# EAGLE board Mixer-Analog-OPA1644-Rev-C.b#6 (EAGLE 8.4.3)

Size 100 x 90.05 mm. Coordinates in mm from the lower left corner, seen from the top.
Outline: 0,0.05 100,0 100,90 0,90.05 0,0.05
Copper layers (1*16): Top 0.035mm / dielectric 1.5mm / Bottom 0.035mm
Design rules "default": minimum track width 6mil, minimum drill 0.35mm, track to track 6mil, track to pad 6mil, pad to pad 6mil, via to via 6mil, smd to smd 6mil, copper to edge 40mil, drill to drill 6mil, minimum pad ring 10mil, minimum via ring 8mil, stop-mask expansion 4mil, vias tented up to drill 0mil, thermal gap 10mil

## Footprints (pad centres in the part's own frame; a part is rotated, then mirrored left to right if it is on the bottom)
EIA3216-KIT = smd 1.9 x 1.6: A 1.65,0; C -1.65,0
TSSOP14 = smd 0.305 x 0.991: 1 -1.95,-2.918; 2 -1.3,-2.918; 3 -0.65,-2.918; 4 0,-2.918; 5 0.65,-2.918; 6 1.3,-2.918; 7 1.95,-2.918; 8 1.95,2.918; 9 1.3,2.918; 10 0.65,2.918; 11 0,2.918; 12 -0.65,2.918; 13 -1.3,2.918; 14 -1.95,2.918
SJ-3524-SMT = smd 2.5 x 2.2: 1 3.85,-4.6; 3 -3.85,-2.7 | smd 2.5 x 2.8: 2 3.85,4.7 | smd 2.8 x 2.5: 4 -0.75,8.85 | hole 1.7: 0,-3.5; 0,3.5
USB-B-MICRO-SMD = smd 1.45 x 0.4: D+ 2.725,0; D- 2.725,0.65; GND 2.725,-1.3; ID 2.725,-0.65; VBUS 2.725,1.3 | smd 1.5 x 1.8: SHIELD1 0,3.685; SHIELD2 0,-3.685 | smd 1.5 x 2.5: SHIELD3 0,0 | hole 0.85: 2.2,1.9; 2.2,-1.9
1X02_LOCK = drill 1.016 pad 1.88: 1 -0.178,0; 2 2.718,0
LED3MM = drill 0.813 octagon: A -1.27,0; K 1.27,0
PTV112 = drill 1.1 pad 1.676: 1.1 -3,-11; 1.2 -5,-11; 1.3 5,-11; 2.1 -1,-11; 2.2 1,-11; 2.3 3,-11 | drill 1.6 pad 2.8 square: M1 -6.8,0; M2 6.8,0
0603-RES = smd 1.1 x 1: 1 -0.85,0; 2 0.85,0
POT-DUAL-ALPS-RK10J12E0A0A = drill 1 pad 1.321 square: P$1 -4,0; P$2 -2,0; P$3 0,0; P$4 2,0; P$5 4,0 | drill 1.2: P$6 4.65,10; P$7 -4.65,10

## Placement (x,y rotation side)
C1  10uF  [EIA3216-KIT]  5.57,61.82 180 bottom
C2  10uF  [EIA3216-KIT]  5.08,48.24 0 bottom
C3  10uF  [EIA3216-KIT]  10.81,55.92 180 bottom
C4  10uF  [EIA3216-KIT]  95.24,55.92 180 bottom
C5  10uF  [EIA3216-KIT]  88.58,48.2 0 bottom
C6  10uF  [EIA3216-KIT]  26.32,67.8 90 bottom
C7  10uF  [EIA3216-KIT]  2.69,9.21 270 bottom
C8  10uF  [EIA3216-KIT]  7,9.05 90 bottom
C9  10uF  [EIA3216-KIT]  18.64,72.52 270 bottom
C10  10uF  [EIA3216-KIT]  8.89,36.15 270 bottom
C11  10uF  [EIA3216-KIT]  14,9.05 90 bottom
C18  10uF  [EIA3216-KIT]  37.32,67.8 90 bottom
C19  10uF  [EIA3216-KIT]  18.69,9.21 270 bottom
C20  10uF  [EIA3216-KIT]  24.89,36.15 270 bottom
C21  10uF  [EIA3216-KIT]  30.64,72.52 270 bottom
C22  10uF  [EIA3216-KIT]  30,9.05 90 bottom
C23  10uF  [EIA3216-KIT]  23,9.05 90 bottom
C24  10uF  [EIA3216-KIT]  48.32,67.8 90 bottom
C25  10uF  [EIA3216-KIT]  35.69,9.21 270 bottom
C26  10uF  [EIA3216-KIT]  40.89,36.15 270 bottom
C27  10uF  [EIA3216-KIT]  40.64,72.52 270 bottom
C28  10uF  [EIA3216-KIT]  46,9.05 90 bottom
C29  10uF  [EIA3216-KIT]  39,9.05 90 bottom
C36  10uF  [EIA3216-KIT]  59.32,67.8 90 bottom
C37  10uF  [EIA3216-KIT]  51.69,9.21 270 bottom
C38  10uF  [EIA3216-KIT]  56.89,36.15 270 bottom
C39  10uF  [EIA3216-KIT]  51.64,72.52 270 bottom
C40  10uF  [EIA3216-KIT]  62,9.05 90 bottom
C41  10uF  [EIA3216-KIT]  55,9.05 90 bottom
C48  10uF  [EIA3216-KIT]  70.32,67.8 90 bottom
C49  10uF  [EIA3216-KIT]  66.69,9.21 270 bottom
C50  10uF  [EIA3216-KIT]  72.89,36.15 270 bottom
C51  10uF  [EIA3216-KIT]  62.64,72.52 270 bottom
C52  10uF  [EIA3216-KIT]  78,9.05 90 bottom
C53  10uF  [EIA3216-KIT]  71,9.05 90 bottom
C60  10uF  [EIA3216-KIT]  81.32,67.8 90 bottom
C61  10uF  [EIA3216-KIT]  82.69,9.21 270 bottom
C62  10uF  [EIA3216-KIT]  88.89,36.15 270 bottom
C63  10uF  [EIA3216-KIT]  73.64,72.52 270 bottom
C64  10uF  [EIA3216-KIT]  94,9.05 90 bottom
C65  10uF  [EIA3216-KIT]  87,9.05 90 bottom
IC1  OPA1644  [TSSOP14]  49,53.05 0 bottom
IC2  OPA1644  [TSSOP14]  8.98,17.39 0 bottom
IC4  OPA1644  [TSSOP14]  24.98,17.39 0 bottom
IC5  OPA1644  [TSSOP14]  40.98,17.39 0 bottom
IC7  OPA1644  [TSSOP14]  56.98,17.39 0 bottom
IC9  OPA1644  [TSSOP14]  72.98,17.39 0 bottom
IC11  OPA1644  [TSSOP14]  88.98,17.39 0 bottom
J1  SJ-3524-SMT  [SJ-3524-SMT]  22.46,70.62 180 top
J3  SJ-3524-SMT  [SJ-3524-SMT]  33.46,70.62 180 top
J4  SJ-3524-SMT  [SJ-3524-SMT]  44.46,70.62 180 top
J6  SJ-3524-SMT  [SJ-3524-SMT]  55.46,70.62 180 top
J8  [USB-B-MICRO-SMD]  5.66,77.01 270 top
J9  SJ-3524-SMT  [SJ-3524-SMT]  66.46,70.62 180 top
J11  SJ-3524-SMT  [SJ-3524-SMT]  77.46,70.62 180 top
JP1  [1X02_LOCK]  4.24,71.6 0 top
LED1  [LED3MM]  5.73,67.74 180 top
OUTPUT1  SJ-3524-SMT  [SJ-3524-SMT]  6.99,52.04 270 top
OUTPUT2  SJ-3524-SMT  [SJ-3524-SMT]  93,52.05 90 top
POT1  10k  [PTV112]  110.7,71.05 0 top  (outside the outline)
POT2  10k  [PTV112]  -22.67,54.05 0 top  (outside the outline)
POT3  10K  [PTV112]  9,15.05 0 top
POT4  100K  [PTV112]  9,35.73 0 top
POT7  10K  [PTV112]  25,15.05 0 top
POT8  100K  [PTV112]  25,35.73 0 top
POT9  10K  [PTV112]  41,15.05 0 top
POT10  100K  [PTV112]  41,35.73 0 top
POT13  10K  [PTV112]  57,15.05 0 top
POT14  100K  [PTV112]  57,35.73 0 top
POT17  10K  [PTV112]  73,15.05 0 top
POT18  100K  [PTV112]  73,35.73 0 top
POT21  10K  [PTV112]  89,15.05 0 top
POT22  100K  [PTV112]  89,35.73 0 top
R1  220  [0603-RES]  2,69.05 270 bottom
R2  1M  [0603-RES]  60,50.06 0 bottom
R3  1M  [0603-RES]  58,48.05 0 bottom
R4  1M  [0603-RES]  7,29.05 90 bottom
R5  1M  [0603-RES]  10,29.04 90 bottom
R6  10k  [0603-RES]  10.71,7.96 90 bottom
R7  1M  [0603-RES]  12.03,33.32 270 bottom
R8  1M  [0603-RES]  12.05,37.92 270 bottom
R9  10k  [0603-RES]  5,37.05 270 bottom
R16  10k  [0603-RES]  26.71,7.96 90 bottom
R17  10k  [0603-RES]  21,37.05 270 bottom
R18  1M  [0603-RES]  23,29.05 90 bottom
R19  1M  [0603-RES]  26,29.04 90 bottom
R20  1M  [0603-RES]  28.03,33.32 270 bottom
R21  1M  [0603-RES]  28.05,37.92 270 bottom
R22  10k  [0603-RES]  42.71,7.96 90 bottom
R23  10k  [0603-RES]  37,37.05 270 bottom
R24  1M  [0603-RES]  39,29.05 90 bottom
R25  1M  [0603-RES]  42,29.04 90 bottom
R26  1M  [0603-RES]  44.03,33.32 270 bottom
R27  1M  [0603-RES]  44.05,37.92 270 bottom
R34  10k  [0603-RES]  58.71,7.96 90 bottom
R35  10k  [0603-RES]  53,37.05 270 bottom
R36  1M  [0603-RES]  55,29.05 90 bottom
R37  1M  [0603-RES]  58,29.04 90 bottom
R38  1M  [0603-RES]  60.03,33.32 270 bottom
R39  1M  [0603-RES]  60.05,37.92 270 bottom
R46  10k  [0603-RES]  74.71,7.96 90 bottom
R47  10k  [0603-RES]  69,37.05 270 bottom
R48  1M  [0603-RES]  71,29.05 90 bottom
R49  1M  [0603-RES]  74,29.04 90 bottom
R50  1M  [0603-RES]  76.03,33.32 270 bottom
R51  1M  [0603-RES]  76.05,37.92 270 bottom
R58  10k  [0603-RES]  90.71,7.96 90 bottom
R59  10k  [0603-RES]  85,37.05 270 bottom
R60  1M  [0603-RES]  87,29.05 90 bottom
R61  1M  [0603-RES]  90,29.04 90 bottom
R62  1M  [0603-RES]  92.03,33.32 270 bottom
R63  1M  [0603-RES]  92.05,37.92 270 bottom
U$1  POT-DUAL-ALPS-RK10J12E0A0A  [POT-DUAL-ALPS-RK10J12E0A0A]  -8,5.05 0 top  (outside the outline)

## Library data of the parts
C1-C5 R1-R3 = SparkFun-Passives
C6-C11 C18-C29 C36-C41 C48-C53 C60-C65 = SparkFun-Passives; SPICEPREFIX: C
IC1 JP1 U$1 = CMU-ArtFab
IC2 IC4 IC5 IC7 IC9 IC11 = CMU-ArtFab; SPICEPREFIX: B
J1 J3 J4 J6 J9 J11 = con-cuistack; SPICEPREFIX: E
J8 = SparkFun-Connectors; PROD_ID: CONN-11752
LED1 = led
OUTPUT1 OUTPUT2 = con-cuistack
POT1 POT2 = CMU-ArtFab; AVAILABILITY: Unavailable; DESCRIPTION: Alt# Tce-10111410; MF: STMicroelectronics; MP: PTV112; PACKAGE: None; PRICE: None
POT3 POT4 POT7-POT10 POT13 POT14 POT17 POT18 POT21 POT22 = CMU-ArtFab; AVAILABILITY: Unavailable; DESCRIPTION: Alt# Tce-10111410; MF: STMicroelectronics; MP: PTV112; PACKAGE: None; PRICE: None; SPICEPREFIX: J
R4-R9 R16-R27 R34-R39 R46-R51 R58-R63 = SparkFun-Passives; SPICEPREFIX: R

## Nets
5V: C1.A IC1.4 IC2.4 IC4.4 IC5.4 IC7.4 IC9.4 IC11.4 J8.VBUS JP1.2 LED1.A R3.2 R4.2 R7.2 R18.2 R20.2 R24.2 R26.2 R36.2 R38.2 R48.2 R50.2 R60.2 R62.2
COPY\: IC2.1 IC2.2 POT3.1.3
COPY\2: IC4.1 IC4.2 POT7.1.3
COPY\3: IC5.1 IC5.2 POT9.1.3
COPY\5: IC7.1 IC7.2 POT13.1.3
COPY\7: IC9.1 IC9.2 POT17.1.3
COPY\9: IC11.1 IC11.2 POT21.1.3
DLE: C8.A IC2.7 POT4.1.2
DLE2: C23.A IC4.7 POT8.1.2
DLE3: C29.A IC5.7 POT10.1.2
DLE5: C41.A IC7.7 POT14.1.2
DLE7: C53.A IC9.7 POT18.1.2
DLE9: C65.A IC11.7 POT22.1.2
GND: C1.C IC1.11 IC2.11 IC4.11 IC5.11 IC7.11 IC9.11 IC11.11 J8.GND JP1.1 OUTPUT1.1 OUTPUT2.1 POT3.1.1 POT3.2.1 POT7.1.1 POT7.2.1 POT9.1.1 POT9.2.1 POT13.1.1 POT13.2.1 POT17.1.1 POT17.2.1 POT21.1.1 POT21.2.1 R1.1 R2.1 R5.1 R8.1 R19.1 R21.1 R25.1 R27.1 R37.1 R39.1 R49.1 R51.1 R61.1 R63.1
N$1: IC2.13 POT4.2.3 R9.2
N$3: C7.A POT3.1.2
N$4: IC2.6 POT4.1.3 R6.2
N$5: C6.C IC2.3 R4.1 R5.2
N$6: J1.1
N$7: C2.A IC1.1 POT1.1.2
N$8: C7.C R6.1
N$9: IC2.8 IC2.9 POT3.2.3
N$10: C6.A J1.3
N$11: C9.C IC2.10 R7.1 R8.2
N$12: C9.A J1.2 J1.4
N$13: C10.A POT3.2.2
N$14: C10.C R9.1
N$15: LED1.K R1.2
N$17: C3.A IC1.7 POT1.2.2
N$18: C4.C OUTPUT2.2 OUTPUT2.4
N$19: C5.C OUTPUT2.3
N$21: C4.A IC1.8 POT2.1.2
N$23: C5.A IC1.14 POT2.2.2
N$24: C11.A IC2.14 POT4.2.2
N$34: C22.A IC4.14 POT8.2.2
N$35: J3.1
N$36: IC4.13 POT8.2.3 R17.2
N$37: IC4.8 IC4.9 POT7.2.3
N$38: C21.A J3.2 J3.4
N$39: C18.C IC4.3 R18.1 R19.2
N$40: C18.A J3.3
N$41: C21.C IC4.10 R20.1 R21.2
N$42: C19.A POT7.1.2
N$43: C19.C R16.1
N$44: IC4.6 POT8.1.3 R16.2
N$45: C20.A POT7.2.2
N$46: C20.C R17.1
N$47: C28.A IC5.14 POT10.2.2
N$48: J4.1
N$49: IC5.13 POT10.2.3 R23.2
N$50: IC5.8 IC5.9 POT9.2.3
N$51: C27.A J4.2 J4.4
N$52: C24.C IC5.3 R24.1 R25.2
N$53: C24.A J4.3
N$54: C27.C IC5.10 R26.1 R27.2
N$55: C25.A POT9.1.2
N$56: C25.C R22.1
N$57: IC5.6 POT10.1.3 R22.2
N$58: C26.A POT9.2.2
N$59: C26.C R23.1
N$61: C2.C OUTPUT1.2 OUTPUT1.4
N$62: C3.C OUTPUT1.3
N$75: C40.A IC7.14 POT14.2.2
N$76: J6.1
N$77: IC7.13 POT14.2.3 R35.2
N$78: IC7.8 IC7.9 POT13.2.3
N$79: C39.A J6.2 J6.4
N$80: C36.C IC7.3 R36.1 R37.2
N$81: C36.A J6.3
N$82: C39.C IC7.10 R38.1 R39.2
N$83: C37.A POT13.1.2
N$84: C37.C R34.1
N$85: IC7.6 POT14.1.3 R34.2
N$86: C38.A POT13.2.2
N$87: C38.C R35.1
N$101: C52.A IC9.14 POT18.2.2
N$102: J9.1
N$103: IC9.13 POT18.2.3 R47.2
N$104: IC9.8 IC9.9 POT17.2.3
N$105: C51.A J9.2 J9.4
N$106: C48.C IC9.3 R48.1 R49.2
N$107: C48.A J9.3
N$108: C51.C IC9.10 R50.1 R51.2
N$109: C49.A POT17.1.2
N$110: C49.C R46.1
N$111: IC9.6 POT18.1.3 R46.2
N$112: C50.A POT17.2.2
N$113: C50.C R47.1
N$127: C64.A IC11.14 POT22.2.2
N$128: J11.1
N$129: IC11.13 POT22.2.3 R59.2
N$130: IC11.8 IC11.9 POT21.2.3
N$131: C63.A J11.2 J11.4
N$132: C60.C IC11.3 R60.1 R61.2
N$133: C60.A J11.3
N$134: C63.C IC11.10 R62.1 R63.2
N$135: C61.A POT21.1.2
N$136: C61.C R58.1
N$137: IC11.6 POT22.1.3 R58.2
N$138: C62.A POT21.2.2
N$139: C62.C R59.1
OUT-L: C8.C C23.C C29.C C41.C C53.C C65.C IC1.2 IC1.9 POT1.1.3 POT2.1.3
OUT-R: C11.C C22.C C28.C C40.C C52.C C64.C IC1.6 IC1.13 POT1.2.3 POT2.2.3
VGND: IC1.3 IC1.5 IC1.10 IC1.12 IC2.5 IC2.12 IC4.5 IC4.12 IC5.5 IC5.12 IC7.5 IC7.12 IC9.5 IC9.12 IC11.5 IC11.12 R2.2 R3.1

## Tracks (layer width: path | path; a pad name or v marks a point on that pad's centre or on a via)
5V  (23 unrouted)
COPY\  (2 unrouted)
COPY\2  (2 unrouted)
COPY\3  (2 unrouted)
COPY\5  (2 unrouted)
COPY\7  (2 unrouted)
COPY\9  (2 unrouted)
DLE  (2 unrouted)
DLE2  (2 unrouted)
DLE3  (2 unrouted)
DLE5  (2 unrouted)
DLE7  (2 unrouted)
DLE9  (2 unrouted)
GND  (37 unrouted)
N$1  (2 unrouted)
N$3  (1 unrouted)
N$4  (2 unrouted)
N$5  (3 unrouted)
N$7  (2 unrouted)
N$8  (1 unrouted)
N$9  (2 unrouted)
N$10  (1 unrouted)
N$11  (3 unrouted)
N$12  (2 unrouted)
N$13  (1 unrouted)
N$14  (1 unrouted)
N$15  (1 unrouted)
N$17  (2 unrouted)
N$18  (2 unrouted)
N$19  (1 unrouted)
N$21  (2 unrouted)
N$23  (2 unrouted)
N$24  (2 unrouted)
N$34  (2 unrouted)
N$36  (2 unrouted)
N$37  (2 unrouted)
N$38  (2 unrouted)
N$39  (3 unrouted)
N$40  (1 unrouted)
N$41  (3 unrouted)
N$42  (1 unrouted)
N$43  (1 unrouted)
N$44  (2 unrouted)
N$45  (1 unrouted)
N$46  (1 unrouted)
N$47  (2 unrouted)
N$49  (2 unrouted)
N$50  (2 unrouted)
N$51  (2 unrouted)
N$52  (3 unrouted)
N$53  (1 unrouted)
N$54  (3 unrouted)
N$55  (1 unrouted)
N$56  (1 unrouted)
N$57  (2 unrouted)
N$58  (1 unrouted)
N$59  (1 unrouted)
N$61  (2 unrouted)
N$62  (1 unrouted)
N$75  (2 unrouted)
N$77  (2 unrouted)
N$78  (2 unrouted)
N$79  (2 unrouted)
N$80  (3 unrouted)
N$81  (1 unrouted)
N$82  (3 unrouted)
N$83  (1 unrouted)
N$84  (1 unrouted)
N$85  (2 unrouted)
N$86  (1 unrouted)
N$87  (1 unrouted)
N$101  (2 unrouted)
N$103  (2 unrouted)
N$104  (2 unrouted)
N$105  (2 unrouted)
N$106  (3 unrouted)
N$107  (1 unrouted)
N$108  (3 unrouted)
N$109  (1 unrouted)
N$110  (1 unrouted)
N$111  (2 unrouted)
N$112  (1 unrouted)
N$113  (1 unrouted)
N$127  (2 unrouted)
N$129  (2 unrouted)
N$130  (2 unrouted)
N$131  (2 unrouted)
N$132  (3 unrouted)
N$133  (1 unrouted)
N$134  (3 unrouted)
N$135  (1 unrouted)
N$136  (1 unrouted)
N$137  (2 unrouted)
N$138  (1 unrouted)
N$139  (1 unrouted)
OUT-L  (9 unrouted)
OUT-R  (9 unrouted)
VGND  (17 unrouted)

## Text on the board
tNames: Mixer-Analog-OPA-1644-Rev-C